# Altium PCB Ledrock.PcbDoc
Units mm, origin at the board's own origin, x right, y up, seen from the top; angles counter-clockwise.
Board outline 49.5 x 38.25 mm, 2 copper layers (Top Layer, Bottom Layer); 20 components, 15 nets, 68 pads, 14 vias.
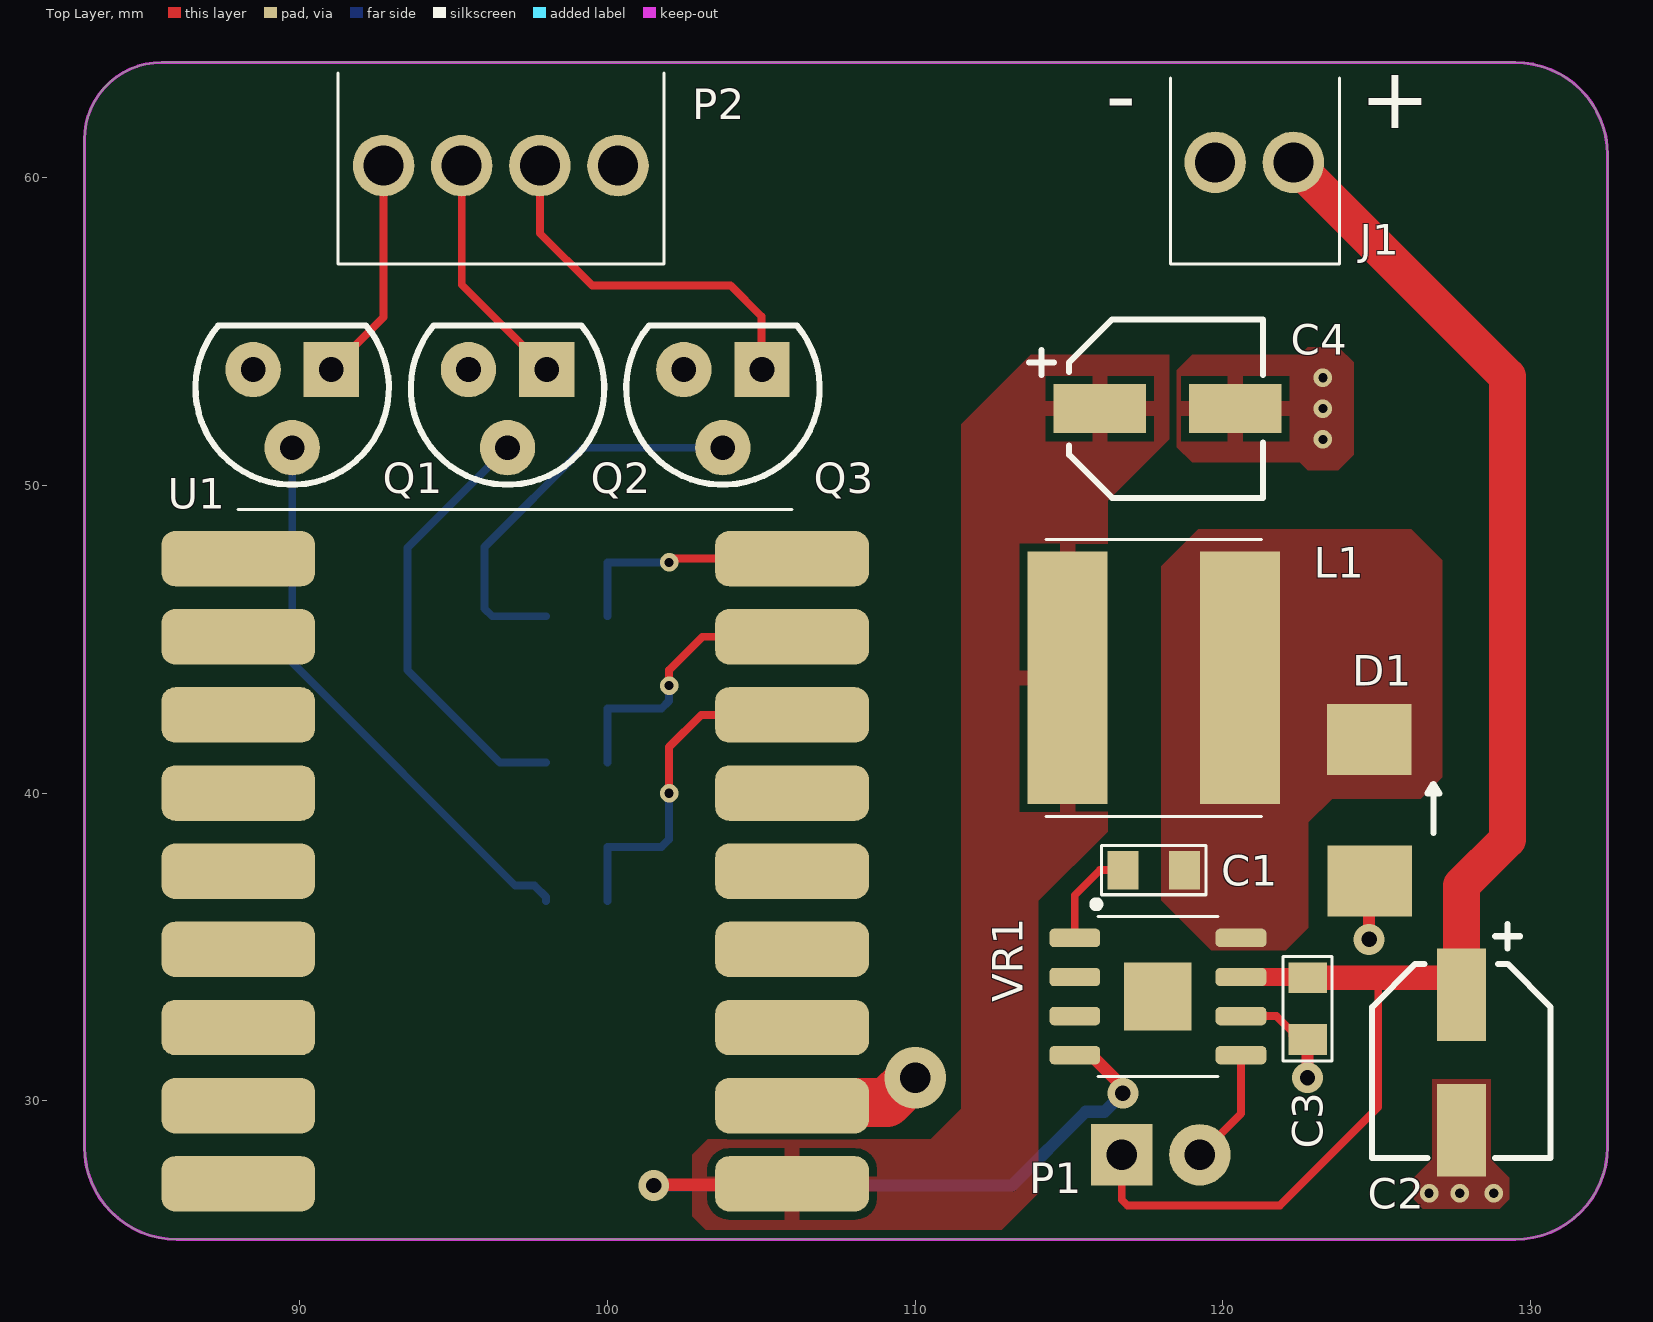
[diagram p0: Top Layer view]
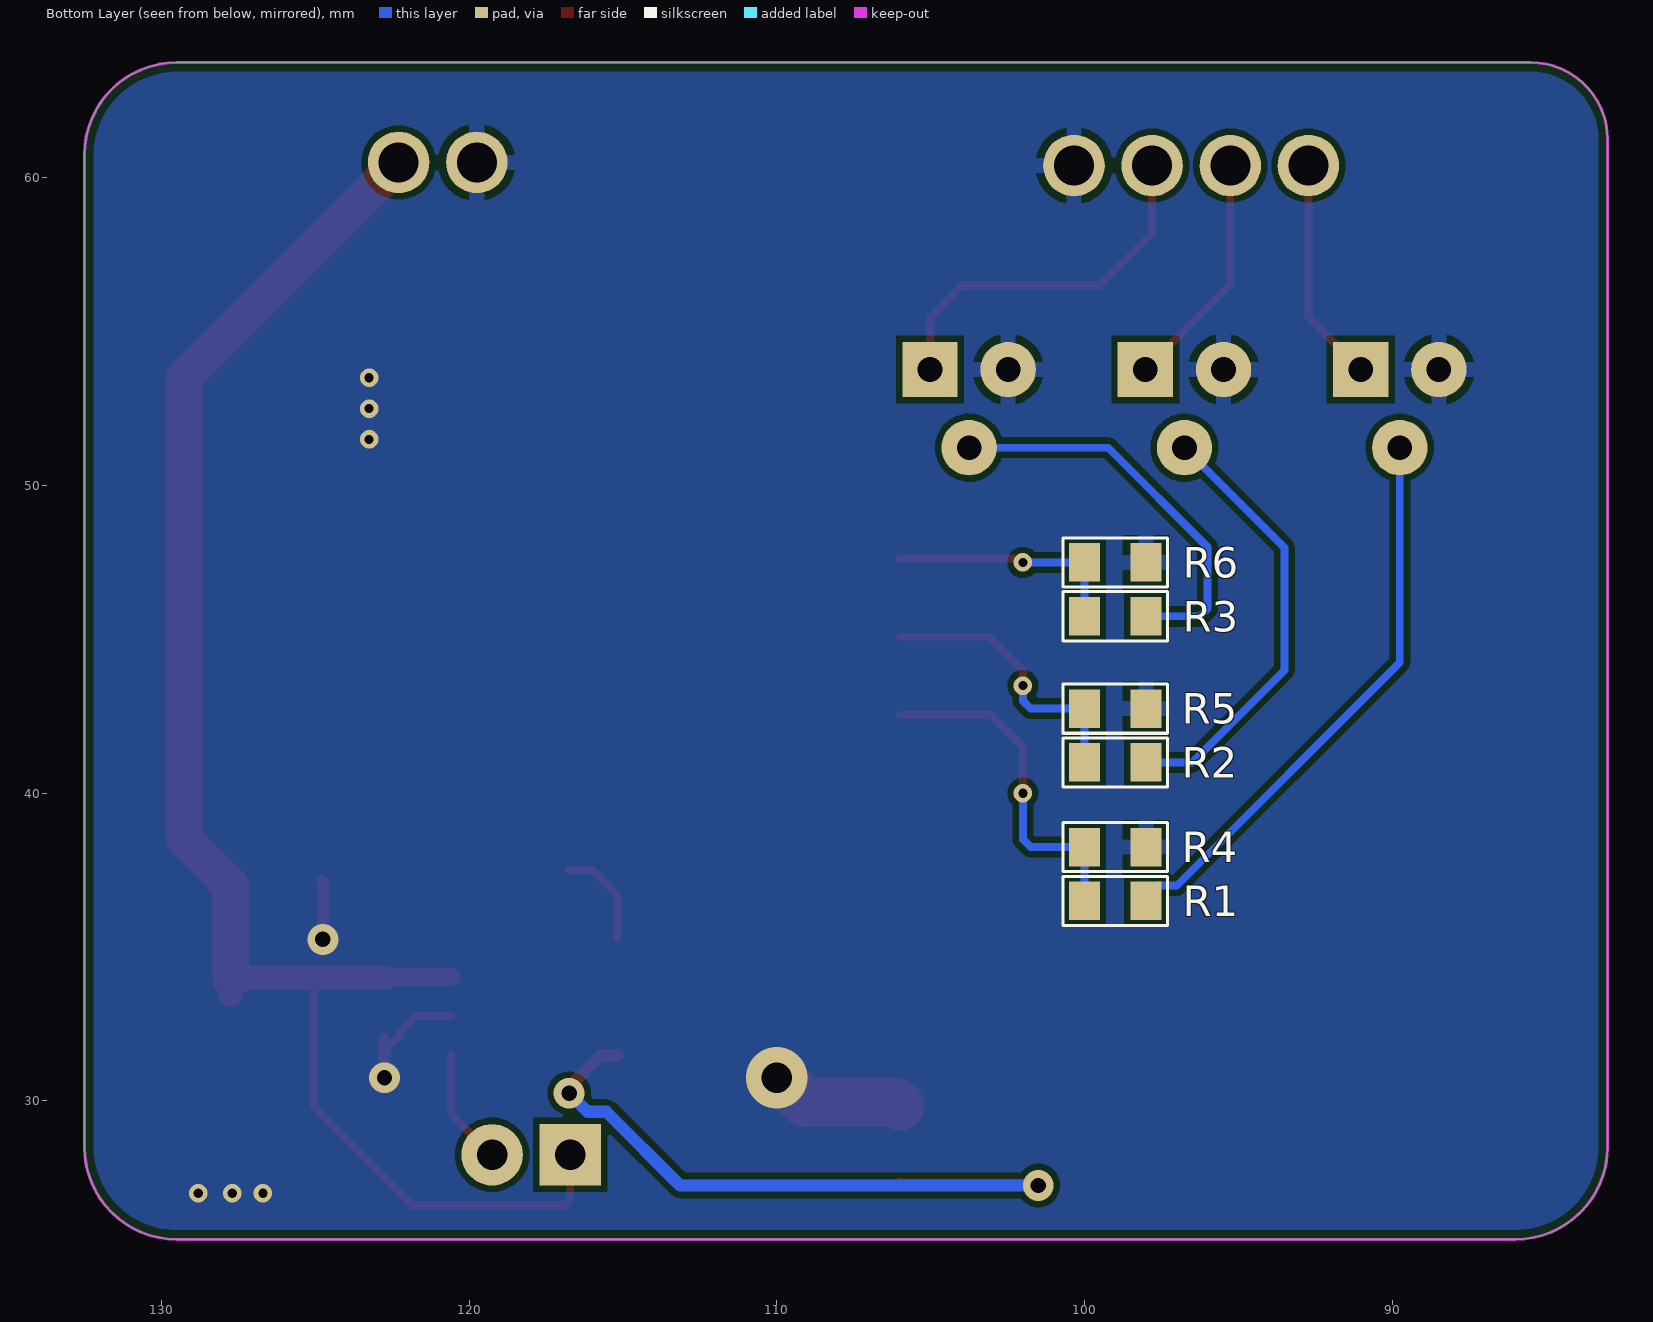
[diagram p1: Bottom Layer view, seen from below]
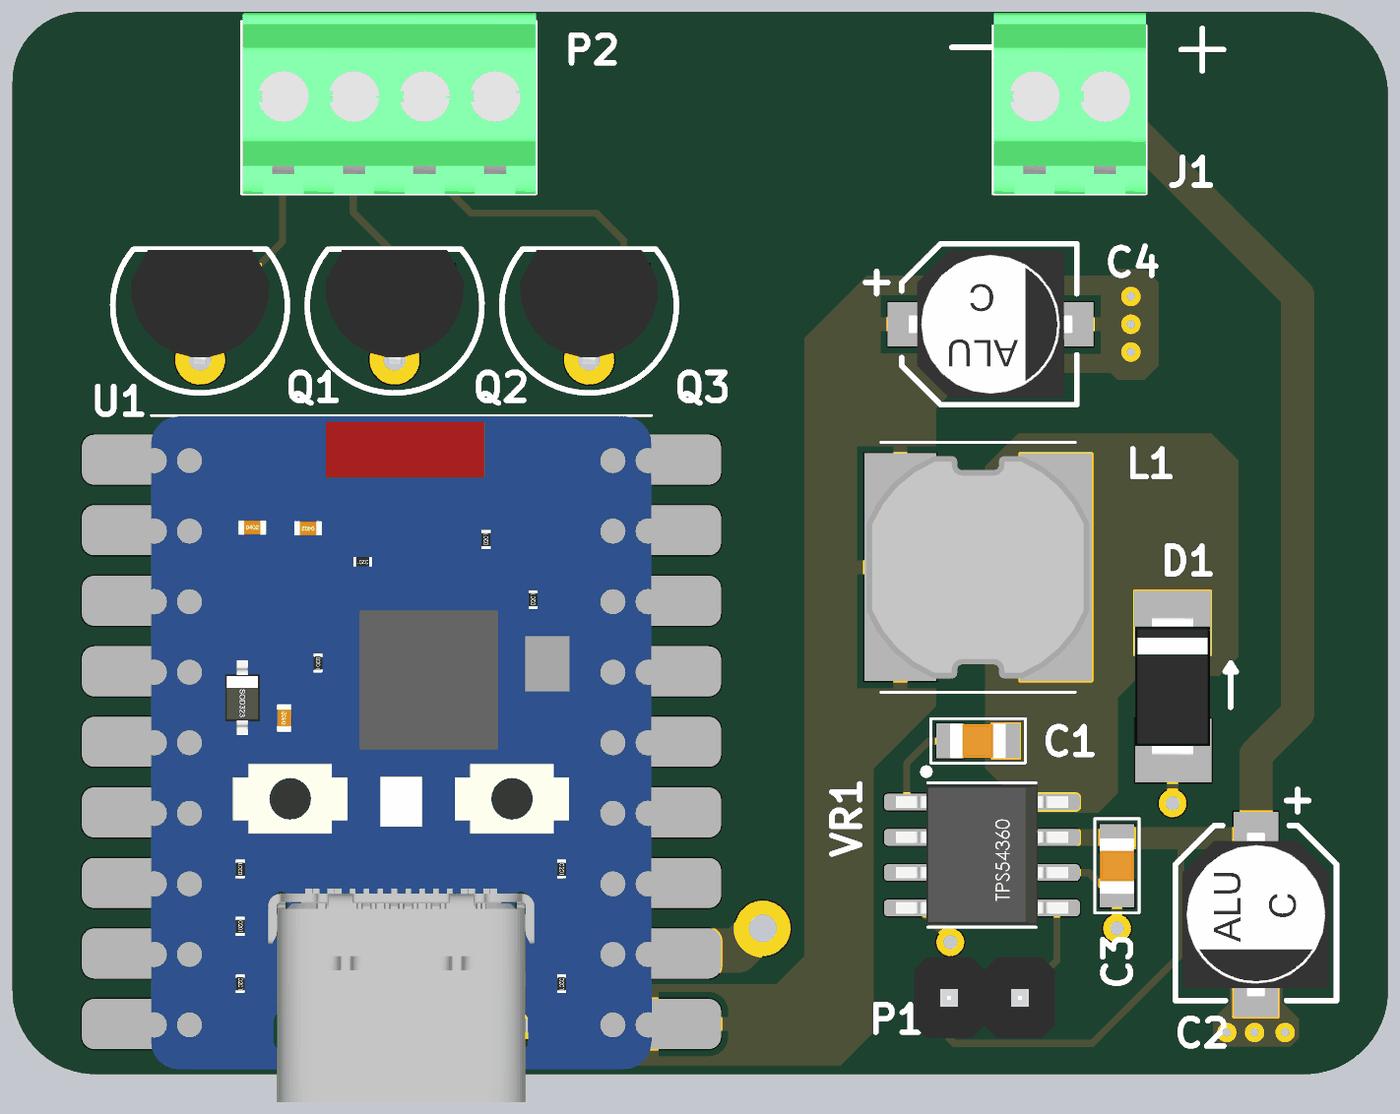
[diagram p2: 3D render of the assembled board from above, using the file's embedded part models]
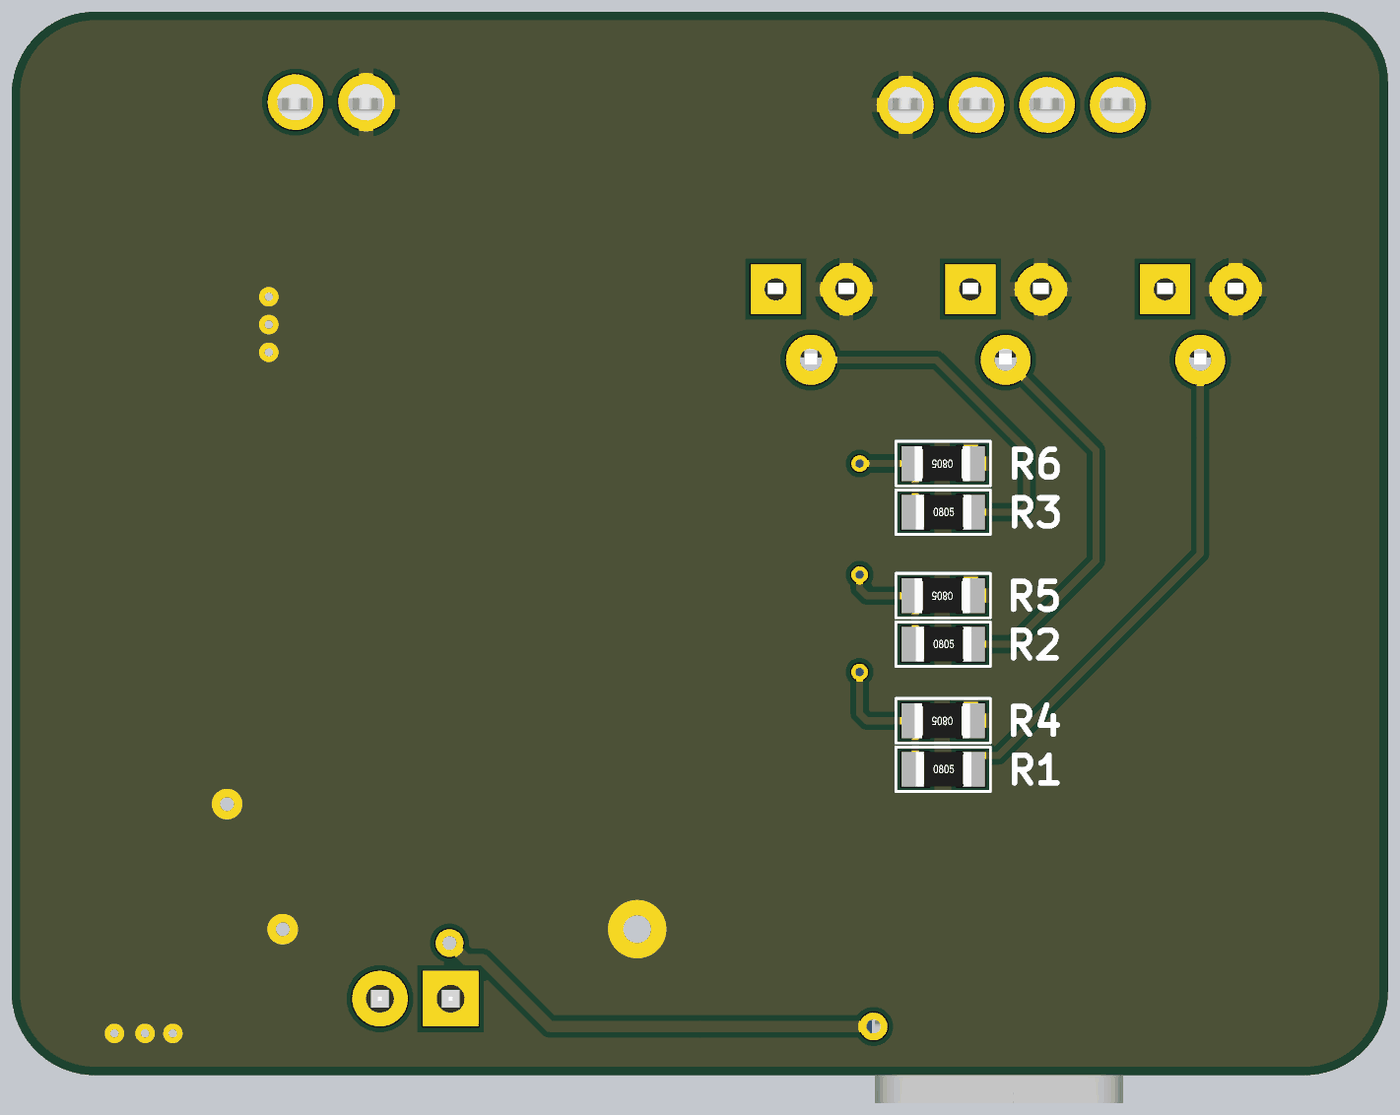
[diagram p3: 3D render of the assembled board from below, using the file's embedded part models]

## Layer stack, top to bottom
Top Solder: solder mask 0.0102, Solder Resist, Dk 3.5
Top Layer: signal copper 0.0356
Dielectric 1: dielectric 0.32, FR-4, Dk 4.8
Bottom Layer: signal copper 0.0356
Bottom Solder: solder mask 0.0102, Solder Resist, Dk 3.5

## Board outline
83,28.5 83,61.25 cw(c85.5,61.25) 85.5,63.75 129.5,63.75 cw(c129.5,60.75) 132.5,60.75 132.5,28.5 cw(c129.5,28.5) 129.5,25.5 86,25.5 cw(c86,28.5)

## Design rules (kind name [scope] priority, off if disabled: settings)
BoardOutlineClearance [All] p1: gap=0.3 ignorepadtopadclearanceinfootprint=FALSE except(0.4: Arc-SplitBarrior Arc-SplitContinuation Track-SplitBarrior Track-SplitContinuation SMDPad-SplitBarrior SMDPad-SplitContinuation THPad-SplitBarrior THPad-SplitContinuation Via-SplitBarrior Via-SplitContinuation Fill-SplitBarrior Fill-SplitContinuation Poly-SplitBarrior Poly-SplitContinuation Region-SplitBarrior Region-SplitContinuation Text-SplitBarrior Text-SplitContinuation)
Clearance [All] p1: gap=0.2 ignorepadtopadclearanceinfootprint=FALSE except(0.1: Arc-Arc Arc-Track Track-Track; 0.127: SMDPad-SMDPad SMDPad-Via THPad-Via Via-Via; 0.15: SMDPad-Text THPad-Text Via-Text; 0.254: Arc-Via Arc-Text Track-Via Track-Text SMDPad-THPad Fill-Text Poly-Text Region-Text Text-Text; 0.5: THPad-THPad)
HoleSize [All] p1: absolutevalues=TRUE maxlimit=6.3 minlimit=0.2 maxpercent=80.000 minpercent=20.000
HoleToHoleClearance [All] p1: gap=0.254 allowstackedmicrovias=FALSE
MinimumAnnularRing [All] p1: minimumring=0.13
MinimumSolderMaskSliver [All] p1: minsoldermaskwidth=0.13 // Black and white soldermask has 0.13, instead of 0.1mm
PolygonConnect SW [InNet('SW') vs InNet('SW')] p1: thpad.connectstyle=Relief thpad.reliefconductorwidth=0.508 thpad.reliefentries=4 thpad.polygonreliefangle="90 Angle" thpad.airgapwidth=0.254 smdpad.connectstyle=Direct smdpad.reliefconductorwidth=0.8 smdpad.reliefentries=4 smdpad.polygonreliefangle="90 Angle" smdpad.airgapwidth=0.2 via.connectstyle=Direct via.reliefconductorwidth=0.508 via.reliefentries=4 via.polygonreliefangle="90 Angle" via.airgapwidth=0.254
PolygonConnect PolygonConnect_1 [All] p2: thpad.connectstyle=Relief thpad.reliefconductorwidth=0.508 thpad.reliefentries=4 thpad.polygonreliefangle="90 Angle" thpad.airgapwidth=0.254 smdpad.connectstyle=Relief smdpad.reliefconductorwidth=0.508 smdpad.reliefentries=4 smdpad.polygonreliefangle="90 Angle" smdpad.airgapwidth=0.254 via.connectstyle=Direct via.reliefconductorwidth=0.508 via.reliefentries=4 via.polygonreliefangle="90 Angle" via.airgapwidth=0.254
RoutingCorners [All] p1: cornerstyle=Round minsetback=2.54 maxsetback=2.54
RoutingVias [All] p1: holewidth=0.5 width=1 viastyle="Through Hole" minholewidth=0.2 minwidth=0.35 maxholewidth=1 maxwidth=2
SilkToSilkClearance [All] p1: silktosilkclearance=0.1
SilkToSolderMaskClearance [IsPad] p1: minsilkscreentomaskgap=0.1 clearancetoexposedcopper=TRUE
SolderMaskExpansion [All] p1: expansion=0.05 istentingtop=FALSE
Width [All] p1: maxlimit=2.54 minlimit=0.1 preferedwidth=0.4 minimp=50.000000 maximp=50.000000 favimp=50.000000
24 further rules are at their usual default settings.

## Components (designator, comment, footprint, x,y, rotation, side; value= is the part's Value field where it differs from the comment)
C1 "0805, capacitor" "0805, cap" 116.75,37.5 r0 top value=10n
C2 "" "Cap, SMD, Polar, 5.3x5.3mm" 127.75,31.25 r0 top value=47u
C3 "0805, capacitor" "0805, cap" 122.75,32 r90 top value=1u
C4 "Capacitor, TH 2mm" "Cap, SMD, Polar, 5.3x5.3mm" 118.2,52.5 r90 top value=47u
D1 "MBRS2040LT3G" CASE_403A 124.75,40.734 r270 top
J1 "2 Pole Block Connector" "2 Pole Block 2.54 mm TBC05" 122.29,60.5 r180 top
L1 "33 uH" Inductor-SRN8040 117.75,43.75 r0 top
P1 "1x2 Pin Heade Straight" padtwo_L 116.71,28.25 r90 top value="1x2 Pin Header"
P2 "TBL002A-350-04GY-2GY" "4 Pole Block 2.54mm TBC05" 100.34,60.4 r180 top
Q1 "BC547" BC547_TO-92_BENT 89.75,52.5 r270 top
Q2 "BC547" BC547_TO-92_BENT 96.75,52.5 r270 top
Q3 "BC547" BC547_TO-92_BENT 103.75,52.5 r270 top
R1 "General resistor" 0805 100,36.5 r180 bottom value=0
R2 "General resistor" 0805 100,41 r180 bottom value=0
R3 "General resistor" 0805 100,45.75 r180 bottom value=0
R4 "General resistor" 0805 98,38.25 r0 bottom value=10k
R5 "General resistor" 0805 98,42.75 r0 bottom value=10k
R6 "General resistor" 0805 98,47.5 r0 bottom value=10k
U1 "ESP32-C6-Zero" ESP32-C6-Zero 105.997,27.305 r180 top
VR1 "" PowerPAD_Soic8 117.887,33.392 r0 top

## Footprints (in the part's own frame and the unit in brackets; to place one, negate y for a bottom-side part, rotate by r counter-clockwise, add the part's x,y. Pads: shape width x height; smd on the part's side, far side on the other; paste and mask are expansions set on the pad)
"2 Pole Block 2.54 mm TBC05" [mm] "TBC05 series by GCT"
  round 2 hole 1.3: 1(0,0) 2(2.54,0)
  silkscreen extent -1.5,-2.75 4,3.3, body extent -1.5,-3.2 3.98,3.3, height 8.5
"4 Pole Block 2.54mm TBC05" [mm]
  round 2 hole 1.3: 1(0,0) 2(2.54,0) 3(5.08,0) 4(7.62,0)
  silkscreen extent -1.5,-3 9.1,3.2, body extent -1.5,-3.3 9.06,3.2, height 8.5
0805 [mm]
  rect 1x1.25 smd: 1(0,0) 2(2,0)
  silkscreen extent -0.7,-0.8 2.7,0.8, body extent 0.03,-0.62 2.03,0.63, height 0.5
"0805, cap" [mm]
  rect 1x1.25 smd: 1(0,0) 2(2,0)
  silkscreen extent -0.7,-0.8 2.7,0.8, body extent -0.01,-0.62 1.99,0.63, height 0.8
BC547_TO-92_BENT [mm]
  rect 1.8x1.8 hole 0.8: 1(-1.27,1.27)
  round 1.8 hole 0.8: 2(1.27,0) 3(-1.27,-1.27)
  silkscreen extent -2.7,-3.14 2.47,3.14, body extent -2.67,-2.49 1.44,2.49, height 9.5
"Cap, SMD, Polar, 5.3x5.3mm" [mm] "Wurth WCAP-ASLI series"
  rect 1.6x3 smd: 1(0,-2.2) 2(0,2.2)
  silkscreen extent -2.9,-3.1 2.9,4.5, body extent -2.65,-2.95 2.65,2.95, height 5.41
CASE_403A [mm]
  rect 2.3x2.75 smd: 1(-1.016,0) 2(3.584,0.025)
  silkscreen extent 0.43,1.9 2.02,2.29, body extent -1.23,-1.35 3.77,1.35, height 2.15
ESP32-C6-Zero [mm]
  rrect50% 5x1.8 smd: 1(0,0) 2(0,-2.54) 3(0,-5.08) 4(0,-7.62) 5(0,-10.16) 6(0,-12.7) 7(0,-15.24) 8(0,-17.78) 9(0,-20.32) 10(18,-20.32) 11(18,-17.78) 12(18,-15.24) 13(18,-12.7) 14(18,-10.16) 15(18,-7.62) 16(18,-5.08) 17(18,-2.54) 18(18,0)
  silkscreen extent 0,-21.91 18,-21.91, body extent 0,-21.88 18.02,2.84, height 4.85
Inductor-SRN8040 [mm]
  rect 2.6x8.2 smd: 1(-2.8,0) 2(2.8,0)
  silkscreen extent -3.5,-4.5 3.5,4.5, body extent -4,-4 4,4, height 4
padtwo_L [mm] "Pad Diameter 2 mm, Hole  0.3 mm, Pitch 2.54 mm"
  rect 2x2 hole 1: 1(0,0)
  round 2 hole 1: 2(0,-2.54)
  body extent -1.46,-3.81 1.46,1.27, height 8.51
PowerPAD_Soic8 [mm] "SOIC 8 PowerPAD"
  rrect50% 1.65x0.6 smd: 1(-2.7,1.905) 2(-2.7,0.635) 3(-2.7,-0.635) 4(-2.7,-1.905) 5(2.7,-1.905) 6(2.7,-0.635) 7(2.7,0.635) 8(2.7,1.905)
  rect 2.2x2.2 smd: EP1(0,0)
  silkscreen extent -2.1,-2.6 1.95,3.1, body extent -3.1,-2.5 3.1,2.5, height 1.58

## Part data
C2: library part "Capacitor, TH 2mm", "Capacitor TH 2mm"
C4: "Capacitor TH 2mm"
D1: "Diode, Schottky Barrier, Vr 40V, If 2A, Pkg Smb, Vf 0.43V, Tj +125DEGC, Cs 70A, Ir 20MA", Manufacturer Part Number=MBRS2040LT3G
L1: library part Inductor, Manufacturer Part Number=SRN8040-330M
P1: "2.54 mm, TH"
P2: library part "4 Pole Block Connector", "1~24 Poles, Screwless, 45°, 3.50 Pitch, 24~20 (AWG), Terminal Block Connector", Manufacturer="CUI Devices", Supplier Part Number 1=490-TBL002A3504GY2GY, Category="Terminal Blocks", Manufacturer Part Number=TBL002A-350-04GY-2GY, Pricing 1="1=0,94000, 10=0,45400, 50=0,45400, 100=0,43400, 1000=0,35800, 10000=0,26800 (USD)", RoHS=Yes, Stock 1=1130, Supplier 1=Mouser
Q1 Q2 Q3: library part "NPN CBE"
R1 R2 R3 R4 R5 R6: library part resistor
U1: "Waveshare board with ESP32-C6FH4 MCU"
VR1: library part LM22675MRX-5.0/NOPB, "4.5V to 42V, 1A SIMPLE SWITCHER® buck converter with precision enable 8-SO PowerPAD -40 to 125", Manufacturer="Texas Instruments", Manufacturer Lifecycle Status=ACTIVE, Max Operating Temperature=125°C, Max Output current=1A, Max Supply Voltage=42V, Min Input Voltage=4.5V, Min Operating Temperature=-40°C, Min Output Voltage=5V, Quiescent Current=3.4mA, Supplier Part Number=296-38092-1-ND, Switching Frequency=500kHz, Category="Voltage Regulators - Switching", ComponentLink1Description=https://sigma.octopart.com:443/104526336/technical_drawing/Texas-Instruments-LM22675MRX-5.0-NOPB.pdf?src-supplier=Texas+Instruments, ComponentLink1URL=https://sigma.octopart.com:443/104526336/technical_drawing/Texas-Instruments-LM22675MRX-5.0-NOPB.pdf?src-supplier=Texas+Instruments, ComponentLink2Description=https://octopart.com:443/opatz8j6/c1?t=iWK7ArRoTM6KqeCSTlbnN1OG6JoRpO_L3GF_ll-8BpIDIk97LOXDM_Jhq1ccS_mUg7GZXuZ0QTLgCEpcy4-n-A9GGS2DlfdSpAe71VbeSB84VOUYj7seC8Me1JaJGGILGZiZx0VZ820pCuUMkMF5Kfj4vKRG4R48ME__co-UMoJ6V0sVJeKPhKnVNc00aYq7nXUaO7WOIMpz28n_VfT9lbiWW8gy5pu8meoN72G9Yh3SHmBDxdpIUMhGPAO2P4CRp2dnTFFNW_ZJnCGrPDCDSG45DhkyPdtjVqXPR93MCue5n5zi9O-V1toA0DH5Zzok3SpEPMd1ClIINirX6zakUhggfiWnB4ksZz6PATo8G6j1B5qdvLq7avxHcWrW24L3gYtmNo0&src-supplier=Texas+Instruments, ComponentLink2URL=https://octopart.com:443/opatz8j6/c1?t=iWK7ArRoTM6KqeCSTlbnN1OG6JoRpO_L3GF_ll-8BpIDIk97LOXDM_Jhq1ccS_mUg7GZXuZ0QTLgCEpcy4-n-A9GGS2DlfdSpAe71VbeSB84VOUYj7seC8Me1JaJGGILGZiZx0VZ820pCuUMkMF5Kfj4vKRG4R48ME__co-UMoJ6V0sVJeKPhKnVNc00aYq7nXUaO7WOIMpz28n_VfT9lbiWW8gy5pu8meoN72G9Yh3SHmBDxdpIUMhGPAO2P4CRp2dnTFFNW_ZJnCGrPDCDSG45DhkyPdtjVqXPR93MCue5n5zi9O-V1toA0DH5Zzok3SpEPMd1ClIINirX6zakUhggfiWnB4ksZz6PATo8G6j1B5qdvLq7avxHcWrW24L3gYtmNo0&src-supplier=Texas+Instruments, ComponentLink3Description=https://datasheet.octopart.com:443/LM22675MRX-5.0-NOPB-Texas-Instruments-datasheet-34142290.pdf?src-supplier=Texas+Instruments, ComponentLink3URL=https://datasheet.octopart.com:443/LM22675MRX-5.0-NOPB-Texas-Instruments-datasheet-34142290.pdf?src-supplier=Texas+Instruments, ComponentLink4Description=https://datasheet.octopart.com:443/LM22675MRX-5.0-NOPB-Texas-Instruments-datasheet-14446427.pdf?src-supplier=Texas+Instruments, ComponentLink4URL=https://datasheet.octopart.com:443/LM22675MRX-5.0-NOPB-Texas-Instruments-datasheet-14446427.pdf?src-supplier=Texas+Instruments, ComponentLink5Description=https://datasheet.octopart.com:443/LM22675MRX-5.0/NOPB-Texas-Instruments-datasheet-12509805.pdf?src-supplier=Texas+Instruments, ComponentLink5URL=https://datasheet.octopart.com:443/LM22675MRX-5.0/NOPB-Texas-Instruments-datasheet-12509805.pdf?src-supplier=Texas+Instruments, ComponentLink6Description=https://sigma.octopart.com:443/49250132/technical_drawing/Texas-Instruments-LM22675MRX-5.0-NOPB.pdf?src-supplier=Texas+Instruments, ComponentLink6URL=https://sigma.octopart.com:443/49250132/technical_drawing/Texas-Instruments-LM22675MRX-5.0-NOPB.pdf?src-supplier=Texas+Instruments, ComponentLink7Description=https://datasheet.octopart.com:443/LM22675MRX-5.0-NOPB-Texas-Instruments-datasheet-81454324.pdf?src-supplier=Newark, ComponentLink7URL=https://datasheet.octopart.com:443/LM22675MRX-5.0-NOPB-Texas-Instruments-datasheet-81454324.pdf?src-supplier=Newark, ComponentLink8Description=https://datasheet.octopart.com:443/LM22675MRX-5.0-NOPB-Texas-Instruments-datasheet-165803959.pdf?src-supplier=LCSC, ComponentLink8URL=https://datasheet.octopart.com:443/LM22675MRX-5.0-NOPB-Texas-Instruments-datasheet-165803959.pdf?src-supplier=LCSC, ComponentLink9Description=https://datasheet.octopart.com:443/LM22675MRX-5.0-NOPB-Texas-Instruments-datasheet-159611943.pdf?src-supplier=LCSC, ComponentLink9URL=https://datasheet.octopart.com:443/LM22675MRX-5.0-NOPB-Texas-Instruments-datasheet-159611943.pdf?src-supplier=LCSC, ComponentLink10Description=https://datasheet.octopart.com:443/LM22675MRX-5.0-NOPB-Texas-Instruments-datasheet-141944471.pdf?src-supplier=Arrow.cn, ComponentLink10URL=https://datasheet.octopart.com:443/LM22675MRX-5.0-NOPB-Texas-Instruments-datasheet-141944471.pdf?src-supplier=Arrow.cn, ComponentLink11Description=https://datasheet.octopart.com:443/LM22675MRX-5.0-NOPB-Texas-Instruments-datasheet-61210456.pdf?src-supplier=Future+Electronics, ComponentLink11URL=https://datasheet.octopart.com:443/LM22675MRX-5.0-NOPB-Texas-Instruments-datasheet-61210456.pdf?src-supplier=Future+Electronics, ComponentLink12Description=https://datasheet.octopart.com:443/LM22675MRX-5.0-NOPB-Texas-Instruments-datasheet-137316104.pdf?src-supplier=Future+Electronics, ComponentLink12URL=https://datasheet.octopart.com:443/LM22675MRX-5.0-NOPB-Texas-Instruments-datasheet-137316104.pdf?src-supplier=Future+Electronics, ComponentLink13Description=http://sigma.octopart.com:80/reach_statement/Texas-Instruments-company-64.pdf?src-supplier=Compliance+Statements, ComponentLink13URL=http://sigma.octopart.com:80/reach_statement/Texas-Instruments-company-64.pdf?src-supplier=Compliance+Statements, ComponentLink14Description=http://sigma.octopart.com:80/conflict_mineral_statement/Texas-Instruments-company-63.pdf?src-supplier=Compliance+Statements, ComponentLink14URL=http://sigma.octopart.com:80/conflict_mineral_statement/Texas-Instruments-company-63.pdf?src-supplier=Compliance+Statements, Contact Plating=Tin, Efficiency=90%, Height=1.7mm, Lead Free="Lead Free", Length=4.89mm, Lifecycle Status=Production, Manufacturer Part Number=LM22675MRX-5.0/NOPB, Min Supply Voltage=4.5V, Mounting Technology="Surface Mount", Number of Outputs=1, Operating Supply Voltage=42V, Output Configuration=Positive, Output Current=1A, Output Type=Fixed, Output Voltage=5V, Pins=8, Pricing="1=4,45, 10=3,378, 25=3,1096, 100=2,8145, 250=2,67376, 500=2,58896, 1000=2,51916 (USD)", Radiation Hardening=No, RoHS=Compliant, Schedule B=8542390000, Stock=2125, Supplier=DigiKey, Synchronous Rectifier=No, Thickness=1.48mm, Topology=Buck, Width=3.9mm

## Via types
v1: diameter 0.6, hole 0.3, Top Layer to Bottom Layer, 9 vias
v2: diameter 1, hole 0.5, Top Layer to Bottom Layer, 4 vias
v3: diameter 2, hole 1, Top Layer to Bottom Layer, 1 vias

## Nets (pads, with @x,y where several pads share a name; then routed paths per layer and width w, separated by ;. In a path a pad name is that pad's centre, name@x,y a point inside that pad or via, vN(x,y) a via of type N, cw(c..) or ccw(c..) an arc to the next point about the centre after c; other vN are vias at no path point)
BOOT: C1.1 VR1.1 | length 3.3
  Top Layer w0.254: VR1.1 115.187,36.687 116,37.5 C1.1
CON_B: P2.2 Q3.1 | length 12.3
  Top Layer w0.254: P2.2 97.8,58.2 99.5,56.5 104,56.5 105,55.5 105,53.79 Q3.1
CON_G: P2.3 Q2.1 | length 7.8
  Top Layer w0.254: P2.3 95.26,56.53 Q2.1
CON_R: P2.4 Q1.1 | length 7.3
  Top Layer w0.254: Q1.1 92.72,55.47 P2.4
GND: C2.1 C3.1 C4.1 D1.2 J1.2 P2.1 Q1.3 Q2.3 Q3.3 R4.1 R5.1 R6.1 U1.2 VR1.6 | length 10.3
  Top Layer w0.254: VR1.6 121.743,32.757 122.252,32.248 122.252,32.123 122.625,31.75 C3.1@122.75,31.75 ; C3.1 C3.1@122.8,31.95
  Top Layer w0.4: v2(122.75,30.75) 122.75,31.75 C3.1 ; v2(124.75,35.25) 124.75,37.125 D1.2
  Top Layer w1.6: U1.2 106.097,29.945 109.087,29.945 109.892,30.75 v3(110,30.75)
  other v1: 126.7,27 127.7,27 128.8,27 123.25,51.5 123.25,52.5 123.25,53.5
LED_B: R3.1 R6.2 U1.9 | length 7.8
  Top Layer w0.254: v1(102,47.5) 102.067,47.5 102.192,47.625 U1.9
  Bottom Layer w0.254: R3.1 R6.2 v1(102,47.5)
LED_G: R2.1 R5.2 U1.8 | length 9.3
  Top Layer w0.254: v1(102,43.5) 102,44 103.085,45.085 U1.8
  Bottom Layer w0.254: R2.1 R5.2 101.75,42.75 102,43 v1(102,43.5)
LED_R: R1.1 R4.2 U1.7 | length 11.3
  Top Layer w0.254: v1(102,40) 102,41.5 103.045,42.545 U1.7
  Bottom Layer w0.254: R1.1 R4.2 101.75,38.25 102,38.5 v1(102,40)
NetP1_2: P1.2 VR1.5 | length 3.8
  Top Layer w0.254: P1.2 120.587,29.587 VR1.5
NetQ1_2: Q1.2 R1.2 | length 18.5
  Bottom Layer w0.254: Q1.2 89.75,44.25 97.002,36.998 97.627,36.998 98,36.625 R1.2
NetQ2_2: Q2.2 R2.2 | length 14.3
  Bottom Layer w0.254: Q2.2 93.5,47.98 93.5,44 96.5,41 R2.2
NetQ3_2: Q3.2 R3.2 | length 13.2
  Bottom Layer w0.254: R3.2 96.25,45.75 96,46 96,48 99.23,51.23 Q3.2
SW: C1.2 D1.1 L1.2 VR1.8
VCC: C4.2 L1.1 U1.1 VR1.4 | length 23.2
  Top Layer w0.4: v2(101.5,27.25) 101.528,27.277 105.969,27.277 U1.1 ; VR1.4 115.712,31.487 116.635,30.564 116.635,30.365 v2(116.75,30.25)
  Bottom Layer w0.4: v2(101.5,27.25) 113.144,27.25 115.544,29.65 116.15,29.65 v2(116.75,30.25)
Vin: C2.2 C3.2 J1.1 P1.1 VR1.7 | length 52.5
  Top Layer w0.254: P1.1 116.71,26.79 116.895,26.605 121.855,26.605 125.05,29.8 125.05,34
  Top Layer w0.6: VR1.7 C3.2@122.348,34.027
  Top Layer w0.8: C3.2 125.05,34 127.35,34 C2.2@127.475,33.875 ; C2.2 C2.2@127.75,34
  Top Layer w1.2: J1.1 129.25,53.54 129.25,38.5 127.75,37 C2.2@127.75,34
pads on no net: U1.3 U1.4 U1.5 U1.6 U1.10 U1.11 U1.12 U1.13 U1.14 U1.15 U1.16 U1.17 U1.18 VR1.2 VR1.3 VR1.EP1

## Polygon pours and split planes (outlines as drawn)
VCC on Top Layer "VCC_L01_P006" (solid, pour order 6): 118.25,54.25 113.75,54.25 111.5,52 111.5,29.75 110.5,28.75 103.25,28.75 102.75,28.25 102.75,26.25 103.25,25.75 112.75,25.75 114,27 114,30.625 114,32 114,32.5 114,36.5 116.25,38.75 116.25,49.5 118.25,51.5
GND on Top Layer (solid, pour order 9): 118.5,51.25 119,50.75 122.5,50.75 122.75,50.5 123.75,50.5 124.25,51 124.25,54 123.75,54.5 122.75,54.5 122.5,54.25 119,54.25 118.5,53.75
SW on Top Layer "SW_L01_P000" (solid, remove dead copper, pour order 0): 119.625,34.9 122.05,34.9 122.775,35.625 122.775,39.05 123.55,39.825 126.425,39.825 127.125,40.525 127.125,47.575 126.125,48.575 119.2,48.575 118,47.375 118,36.525
GND on Top Layer "tga" (solid, remove dead copper, pour order 4): 126.2,26.8 126.5,26.5 129,26.5 129.3,26.8 129.3,27.5 128.7,28.1 128.7,30.7 126.8,30.7 126.8,28.1 126.2,27.5
GND on Bottom Layer "GND_L02_P001" (solid, pour order 1): 83,64 133,64 133,25 83,25

## Keep-outs
Keep-Out Layer:
  the board outline again, w0.1

## Silkscreen, mask and mechanical layers (free items; w line width, h text height)
Top Overlay:
  text "-" at 116.2,61.7 h2
  text "+" at 124.45,61.617 h2

## Text inside footprints (layer, text, board x,y; h text height)
J1: Mechanical 13 "PCB Edge" at 123.84,64.883 h0.8 r180
P2: Mechanical 13 "PCB Edge" at 99.29,65.083 h0.8 r180